# EAGLE board all_boards_revc (EAGLE 6.1)
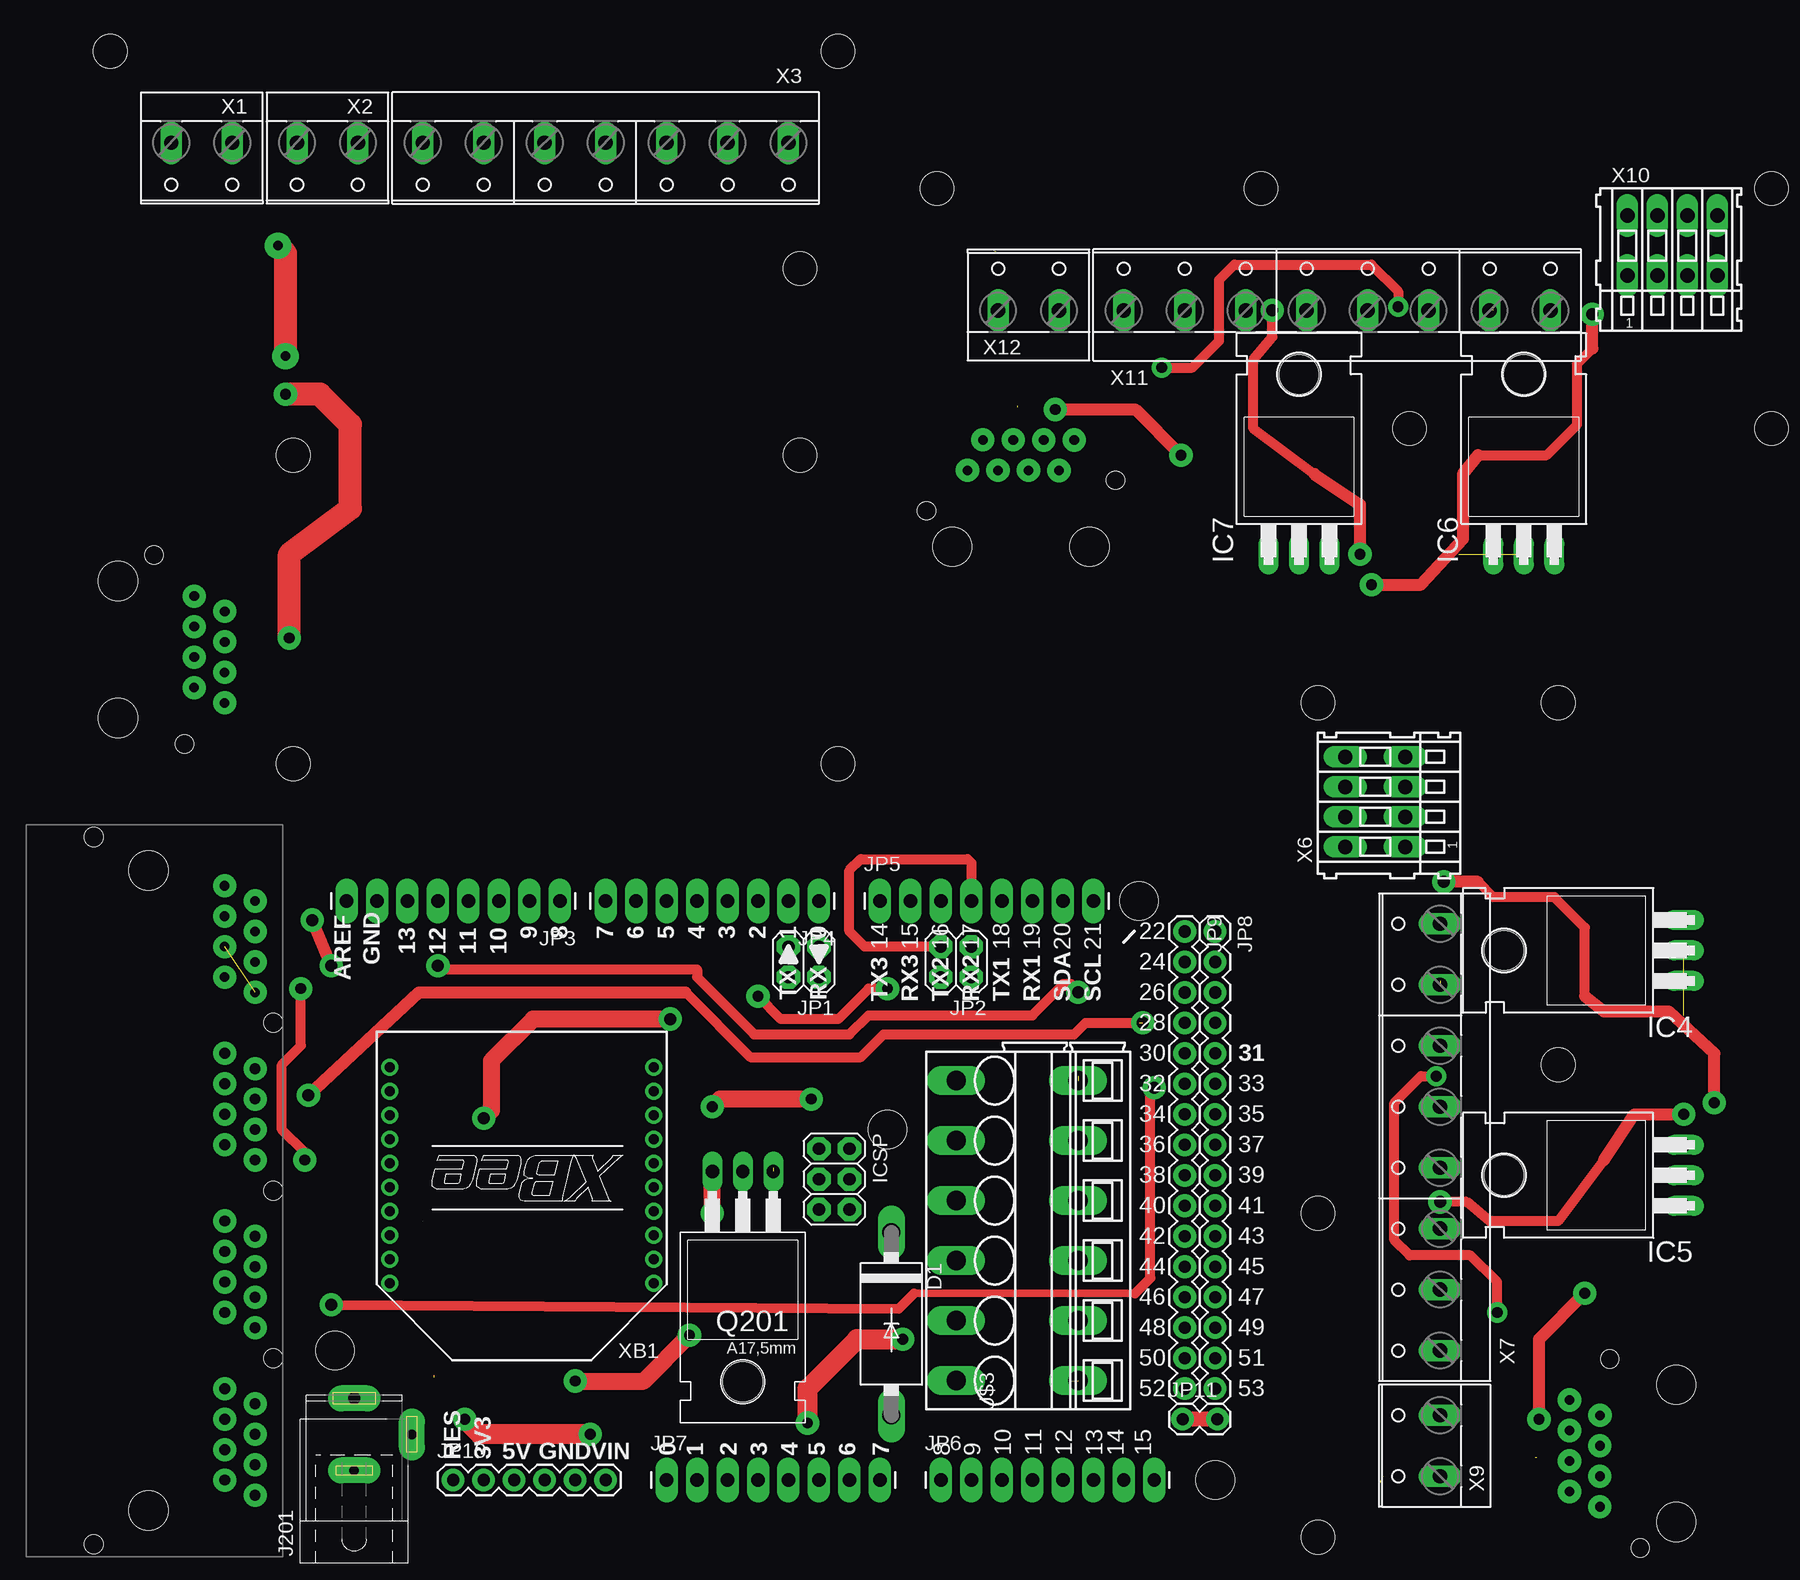
[diagram p0: board, top side]
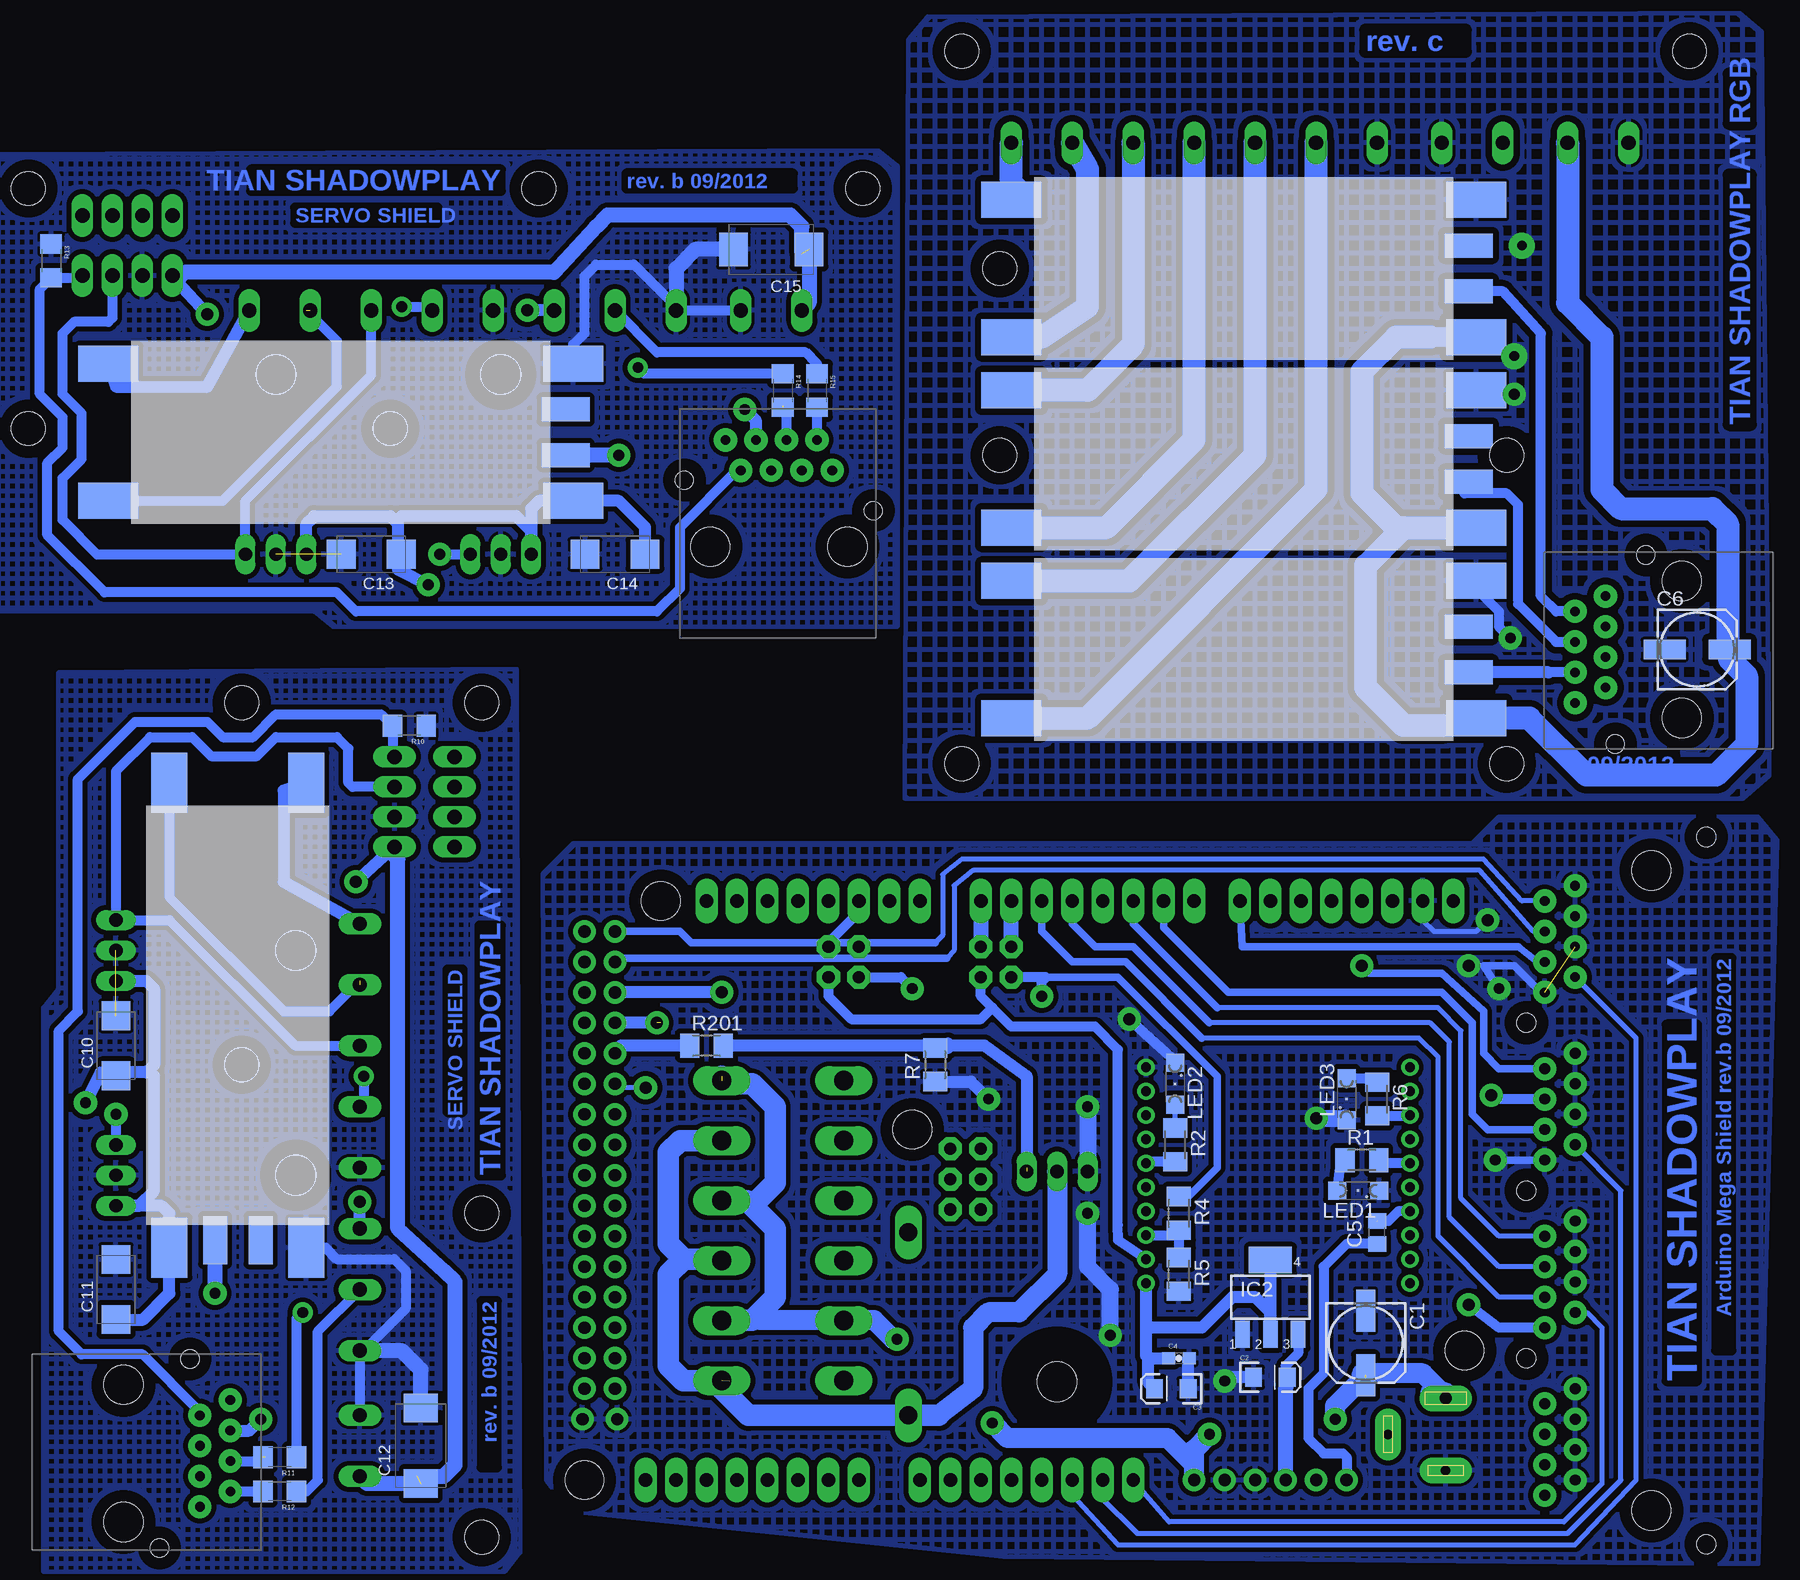
[diagram p1: board, bottom side, seen from below]

No outline drawn. Coordinates in mm, seen from the top.
Copper layers (1*16): Top 0.035mm / dielectric 1.5mm / Bottom 0.035mm
Design rules: minimum track width 10mil, minimum drill 24mil, track to track 8mil, track to pad 8mil, pad to pad 8mil, via to via 8mil, smd to smd 8mil, copper to edge 40mil, drill to drill 8mil, minimum pad ring 10mil, minimum via ring 8mil, stop-mask expansion 4mil, vias tented up to drill 0mil, thermal gap 10mil
Holes 3.2 mm at 92.71,55.24 99.06,6.99 25.72,17.78 71.75,36.2
Holes 2.8 mm at 67.63,126.05 6.99,126.05 67.63,66.67 64.45,92.39 64.45,107.95 22.23,92.39 22.23,66.67 46.99,134.3 34.61,154.31 4.45,154.31 4.45,134.3 73.98,134.3 107.63,29.21 127.64,41.59 127.64,71.75 107.63,71.75 107.63,2.22 102.87,114.62 115.25,94.61 145.41,94.61 145.41,114.62 75.88,114.62

## Footprints (pad centres in the part's own frame; a part is rotated, then mirrored left to right if it is on the bottom)
153CLV-0605 = smd 3.5 x 1.6: + 2.7,0; - -2.7,0
EIA3216 = smd 1.4 x 1.6: A 1.4,0; C -1.4,0
0603-CAP = smd 1.1 x 1: 1 -0.85,0; 2 0.85,0
C0805 = smd 1.3 x 1.5: 1 -0.95,0; 2 0.95,0
SMC_C = smd 2.4 x 2.4: + -2.5,0; - 2.5,0
SMC_E = smd 2.4 x 2.8: + -3.15,0; - 3.15,0
DO27-15 = drill 1.499 long: A 7.62,0; C -7.62,0
SOT223 = smd 1.219 x 2.235: 1 -2.311,-3.099; 2 0,-3.099; 3 2.311,-3.099 | smd 3.6 x 2.2: 4 0,3.099
TO220H = drill 1.118 long: 1 -2.54,-10.16; 2 0,-10.16; 3 2.54,-10.16 | hole 3.302: 0,4.826
2X03 = drill 1.016 pad 1.93 octagon: 1 -2.54,-1.27; 2 -2.54,1.27; 3 0,-1.27; 4 0,1.27; 5 2.54,-1.27; 6 2.54,1.27
SPC4077 = drill 0.8 pad 2.184 long: 1 -3,0; 2 0,-4.8 | drill 1 pad 2.184 long: 3 3,0
2X02 = drill 1.016 pad 1.93 octagon: 1 -1.27,-1.27; 2 -1.27,1.27; 3 1.27,-1.27; 4 1.27,1.27
1X08_LONGPADS = drill 1.118 pad 1.88 long: 1 0,0; 2 2.54,0; 3 5.08,0; 4 7.62,0; 5 10.16,0; 6 12.7,0; 7 15.24,0; 8 17.78,0
1X16 = drill 1.016 pad 1.88: 1 0,0; 2 2.54,0; 3 5.08,0; 4 7.62,0; 5 10.16,0; 6 12.7,0; 7 15.24,0; 8 17.78,0; 9 20.32,0; 10 22.86,0; 11 25.4,0; 12 27.94,0; 13 30.48,0; 14 33.02,0; 15 35.56,0; 16 38.1,0
1X06 = drill 1.016 pad 1.88: 1 0,0; 2 2.54,0; 3 5.08,0; 4 7.62,0; 5 10.16,0; 6 12.7,0
1X02_LOCK = drill 1.016 pad 1.88: 1 -0.178,0; 2 2.718,0
SML1206 = smd 1.5 x 1.5: A 1.75,0; C -1.75,0
4PORT_ETHERNET = drill 0.9 pad 1.93: P$1 25.4,8.89; P$2 24.13,6.35; P$3 22.86,8.89; P$4 21.59,6.35; P$5 20.32,8.89; P$6 19.05,6.35; P$7 17.78,8.89; P$8 16.51,6.35; P$9 11.43,8.89; P$10 10.16,6.35; P$11 8.89,8.89; P$12 7.62,6.35; P$13 6.35,8.89; P$14 5.08,6.35; P$15 3.81,8.89; P$16 2.54,6.35; P$17 -2.54,8.89; P$18 -3.81,6.35; P$19 -5.08,8.89; P$20 -6.35,6.35; P$21 -7.62,8.89; P$22 -8.89,6.35; P$23 -10.16,8.89; P$24 -11.43,6.35 | drill 0.8 pad 1.93: P$25 -16.51,8.89; P$26 -17.78,6.35; P$27 -19.05,8.89; P$28 -20.32,6.35; P$29 -21.59,8.89; P$30 -22.86,6.35; P$31 -24.13,8.89; P$32 -25.4,6.35 | hole 3.25: -26.67,0; 26.67,0 | hole 1.57: -13.97,10.41; 0,10.41; 13.97,10.41; -29.46,-4.57; 29.46,-4.57
TO220 = drill 1.118 long: 1 -2.54,-6.35; 2 0,-6.35; 3 2.54,-6.35 | hole 3.302: 0,11.176
M1206 = smd 1.6 x 2: 1 -1.4,0; 2 1.4,0
1206 = smd 1.6 x 1.8: 1 -1.4,0; 2 1.4,0
BUCK_LED_DRIVER = smd 5 x 3: ANODE -1.905,1.905; KATHODE -1.905,13.335; V+ 36.83,1.905; V- 36.83,13.335 | smd 4 x 2: PWM+ 36.195,5.715; PWM- 36.195,9.525
PHONEIX = drill 1.6 pad 1.8 long: 1 2.58,4.445; 2 7.58,4.445; 3 12.58,4.445; 4 17.58,4.445; 5 22.58,4.445; 6 27.58,4.445; 7 2.58,14.605; 8 7.58,14.605; 9 12.58,14.605; 10 17.58,14.605; 11 22.58,14.605; 12 27.58,14.605
1PORT_ETHERNET = drill 0.8 pad 1.93: P$1 -3.82,3.81; P$2 -6.36,2.54; P$3 -3.82,1.27; P$4 -6.36,0; P$5 -3.82,-1.27; P$6 -6.35,-2.54; P$7 -3.81,-3.81; P$8 -6.35,-5.08 | hole 3.25: 2.54,-6.35; 2.54,5.08 | hole 1.5: -3,-8.51; -0.46,7.24
W237-132 = drill 1.194 long: 1 -2.54,-0.635; 2 2.54,-0.635
W237-7P = drill 1.194 long: 1 -15.24,-0.635; 2 -10.16,-0.635; 3 -5.08,-0.635; 4 0,-0.635; 5 5.08,-0.635; 6 10.16,-0.635; 7 15.24,-0.635
233-104 = drill 1.2 long: A1 -3.75,2.5; A2 -1.25,2.5; A3 1.25,2.5; A4 3.75,2.5; B1 -3.75,-2.5; B2 -1.25,-2.5; B3 1.25,-2.5; B4 3.75,-2.5
W237-8P = drill 1.194 long: 1 -17.78,-0.635; 2 -12.7,-0.635; 3 -7.62,-0.635; 4 -2.54,-0.635; 5 2.54,-0.635; 6 7.62,-0.635; 7 12.7,-0.635; 8 17.78,-0.635
XBEE = drill 0.8 pad 1.422: 1 -11,9; 2 -11,7; 3 -11,5; 4 -11,3; 5 -11,1; 6 -11,-1; 7 -11,-3; 8 -11,-5; 9 -11,-7; 10 -11,-9; 11 11,-9; 12 11,-7; 13 11,-5; 14 11,-3; 15 11,-1; 16 11,1; 17 11,3; 18 11,5; 19 11,7; 20 11,9

## Placement (x,y rotation side)
C1  [153CLV-0605]  33.97,18.41 270 bottom
C2  10uF  [EIA3216]  41.91,15.56 0 bottom
C3  10uF  [EIA3216]  50.16,14.61 180 bottom
C4  0.1uF  [0603-CAP]  49.53,17.14 0 bottom
C5  [C0805]  33.02,27.62 90 bottom
C6  [153CLV-0605]  6.35,76.2 0 bottom
C10  1uF  [SMC_C]  138.11,43.18 90 bottom
C11  1uF  [SMC_C]  138.11,22.86 90 bottom
C12  100uF  [SMC_E]  112.71,9.84 90 bottom
C13  1uF  [SMC_C]  116.84,84.14 180 bottom
C14  1uF  [SMC_C]  96.52,84.14 180 bottom
C15  100uF  [SMC_E]  83.5,109.54 180 bottom
D1  BY550  [DO27-15]  72.07,20 270 top
IC2  MC33269ST-3.3T3  [SOT223]  41.91,22.23 0 bottom
IC4  7806T  [TO220H]  127.95,51.12 90 top
IC5  7806T  [TO220H]  127.95,32.38 90 top
IC6  7806T  [TO220H]  124.78,94.3 0 top
IC7  7806T  [TO220H]  106.05,94.3 0 top
ICSP  [2X03]  67.31,32.07 270 top
J201  [SPC4077]  27.3,10.79 90 top
JP1  [2X02]  64.77,50.16 180 top
JP2  [2X02]  77.47,50.16 180 top
JP3  [1X08_LONGPADS]  44.45,55.24 180 top
JP4  [1X08_LONGPADS]  66.04,55.24 180 top
JP5  [1X08_LONGPADS]  71.12,55.24 0 top
JP6  [1X08_LONGPADS]  76.2,6.99 0 top
JP7  [1X08_LONGPADS]  53.34,6.99 0 top
JP8  M16PTH  [1X16]  99.06,52.7 270 top
JP9  M16PTH  [1X16]  96.52,52.7 270 top
JP10  [1X06]  35.56,6.99 0 top
JP11  [1X02_LOCK]  96.52,12.06 0 top
LED1  [SML1206]  34.61,31.11 180 bottom
LED2  [SML1206]  49.85,40.01 270 bottom
LED3  [SML1206]  35.56,38.73 90 bottom
PORT201  4PORT_ETHERNET  [4PORT_ETHERNET]  10.16,31.11 270 top
Q201  BUZ11  [TO220]  59.69,26.35 180 top
R1  1k  [M1206]  34.29,33.66 0 bottom
R2  1k  [M1206]  49.85,34.92 270 bottom
R4  1k  [M1206]  49.53,29.21 270 bottom
R5  2k  [M1206]  49.53,24.13 270 bottom
R6  1k  [M1206]  33.02,38.73 270 bottom
R7  1k  [M1206]  69.85,41.59 90 bottom
R10  10k  [1206]  113.67,69.85 180 bottom
R11  220R  [1206]  124.46,8.89 180 bottom
R12  220R  [1206]  124.46,6.03 180 bottom
R13  10k  [1206]  143.51,108.58 270 bottom
R14  220R  [1206]  82.55,97.79 270 bottom
R15  220R  [1206]  79.69,97.79 270 bottom
R201  1k  [M1206]  88.9,43.18 0 bottom
U$1  BUCK_LED_DRIVER  [BUCK_LED_DRIVER]  61.59,100.33 0 bottom
U$2  BUCK_LED_DRIVER  [BUCK_LED_DRIVER]  61.59,84.45 0 bottom
U$3  MFKDSP6-5.08  [PHONEIX]  92.08,12.7 90 top
U$4  BUCK_LED_DRIVER  [BUCK_LED_DRIVER]  61.59,68.58 0 bottom
U$5  1PORT_ETHERNET  [1PORT_ETHERNET]  10.16,76.83 0 bottom
U$8  BUCK_LED_DRIVER  [BUCK_LED_DRIVER]  135.57,63.18 270 bottom
U$9  1PORT_ETHERNET  [1PORT_ETHERNET]  134.94,8.57 180 bottom
U$10  BUCK_LED_DRIVER  [BUCK_LED_DRIVER]  136.84,86.68 0 bottom
U$11  1PORT_ETHERNET  [1PORT_ETHERNET]  82.23,87.31 270 bottom
X1  [W237-132]  14.61,117.79 180 top
X2  [W237-132]  25.08,117.79 180 top
X3  [W237-7P]  48.26,117.79 180 top
X6  [233-104]  112.39,63.5 90 top
X7  [W237-8P]  117.16,35.56 90 top
X9  [W237-132]  117.16,9.84 90 top
X10  [233-104]  137.16,109.86 0 top
X11  [W237-8P]  109.22,105.09 0 top
X12  [W237-132]  83.5,105.09 0 top
XB1  XBEE  [XBEE]  41.27,32.38 180 top

## Library data of the parts
C1 C5 C6 R1 R2 R4-R7 R201 = rcl
C2-C4 JP3-JP11 R10-R15 = SparkFun
C10-C15 = resistor
D1 = diode
IC2 IC4-IC7 = linear
ICSP JP1 JP2 = pinhead
J201 = con-jack; OC_FARNELL: unknown; OC_NEWARK: unknown
LED1-LED3 = led
PORT201 U$5 U$9 U$11 = strukt
Q201 = transistor-fet
U$1 U$2 U$4 U$8 U$10 = tian
U$3 = con-phoenix-MFKDSP
X1-X3 X7 X9 X11 X12 = con-wago-508; OC_FARNELL: unknown; OC_NEWARK: unknown
X6 X10 = con-wago; MPN: 233-104; OC_FARNELL: unknown; OC_NEWARK: 28K9046
XB1 = maxstream; MPN: XBP24-Z7UIT-004; OC_FARNELL: 1751799; OC_NEWARK: 34R5507

## Nets
3.3V: C3.A C4.1 IC2.2 IC2.4 XB1.1
5V: C2.A IC2.3 JP10.3
12V: C1.+ J201.3 JP10.6 U$3.2 U$3.4 U$3.6
12V1: C6.+ U$1.V+ U$2.V+ U$4.V+ X1.1
12V3: C10.+ C11.+ C12.+ IC4.1 IC5.1 U$8.V+ X6.B1 X9.1
12V4: C13.+ C14.+ C15.+ IC6.1 IC7.1 U$10.V+ X10.B1 X12.1
+6V3: IC4.3 X6.B3 X7.6
+6V4: IC5.3 X7.3
+6V5: IC6.3 X10.B3 X11.6
+6V6: IC7.3 X11.3
A0: JP7.1 PORT201.P$10
A1: JP7.2 PORT201.P$18
A2: JP7.3 PORT201.P$26
A3: JP7.4
A3.3: JP10.2
A4: JP7.5
A5: JP7.6
A6: JP7.7
A7: JP7.8
A8: JP6.1
A9: JP6.2
A10: JP6.3
A11: JP6.4
A12: JP6.5
A13: JP6.6
A14: JP6.7
A15: JP6.8
AREF: JP3.8
D2: JP4.3 PORT201.P$11
D3: JP4.4 PORT201.P$13
D4: JP4.5
D5: JP4.6 PORT201.P$15
D6: JP4.7 PORT201.P$19
D7: JP4.8
D8: JP3.1 PORT201.P$27
D9: JP3.2
D10: JP3.3
D11: JP3.4
D12: JP3.5
D13: JP3.6
D14: JP5.8
D15: JP5.7
D16: JP5.6
D17: JP5.5
D18: JP2.3 JP5.4
D19: JP2.1 JP5.3
D22: JP9.1 PORT201.P$31
D23: JP8.16
D24: JP9.2 PORT201.P$29
D25: JP8.15
D26: JP9.3 PORT201.P$23
D27: JP8.14
D28: JP9.4 PORT201.P$21
D29: JP8.13
D30: JP9.5 R201.1
D31: JP8.12
D32: JP9.6 PORT201.P$9
D33: JP8.11
D34: JP9.7
D35: JP8.10
D36: JP9.8
D37: JP8.9
D38: JP9.9
D39: JP8.8
D40: JP9.10
D41: JP8.7
D42: JP9.11
D43: JP8.6
D44: JP9.12
D45: JP8.5
D46: JP9.13
D47: JP8.4
D48: JP9.14
D49: JP8.3
D50: JP9.15
D51: JP8.2
D52: JP9.16
D53: JP8.1
DIN: R4.2 R5.1 XB1.3
DOUT: JP1.2 JP2.2 XB1.2
DRAIN: D1.A Q201.2 U$3.1 U$3.3 U$3.5
GND: C1.- C2.C C3.C C4.2 IC2.1 J201.1 JP3.7 JP10.4 JP10.5 JP11.1 JP11.2 LED1.C LED2.C LED3.C PORT201.P$2 PORT201.P$4 PORT201.P$6 PORT201.P$8 PORT201.P$12 PORT201.P$14 PORT201.P$16 PORT201.P$17 PORT201.P$20 PORT201.P$22 PORT201.P$24 PORT201.P$25 PORT201.P$28 PORT201.P$30 PORT201.P$32 Q201.3 R5.2 R7.1 XB1.10
GND1: C6.- U$1.V- U$2.V- U$4.V- X1.2 X2.1 X3.7
GND3: C10.- C11.- C12.- IC4.2 IC5.2 R10.1 U$8.V- X6.B2 X7.1 X7.4 X9.2
GND4: C13.- C14.- C15.- IC6.2 IC7.2 R13.1 U$10.V- X10.B2 X11.1 X11.4 X12.2
LED_ANODE1: U$8.ANODE X7.7
LED_ANODE2: U$10.ANODE X11.7
LED_ANODE_BLUE: U$2.ANODE X3.4
LED_ANODE_GREEN: U$4.ANODE X3.6
LED_ANODE_RED: U$1.ANODE X3.2
LED_KATHODE1: U$8.KATHODE X7.8
LED_KATHODE2: U$10.KATHODE X11.8
LED_KATHODE_BLUE: U$2.KATHODE X3.3
LED_KATHODE_GREEN: U$4.KATHODE X3.5
LED_KATHODE_RED: U$1.KATHODE X3.1
N$1: JP1.4 JP2.4 R4.1
N$2: LED1.A R1.1
N$3: Q201.1 R7.2 R201.2
N$4: R1.2 XB1.15
N$5: R6.2 XB1.13
N$6: LED2.A R2.1
N$7: R2.2 XB1.6
N$8: LED3.A R6.1
N$9: C5.2 XB1.17
N$13: U$8.PWM-
N$14: R11.2 U$9.P$4
N$15: R12.2 U$9.P$2
N$16: U$10.PWM-
N$17: R14.2 U$11.P$4
N$18: R15.2 U$11.P$2
PWM1: U$8.PWM+ U$9.P$6
PWM2: U$10.PWM+ U$11.P$6
PWM_BLUE: U$2.PWM+ U$5.P$4
PWM_GREEN: U$4.PWM+ U$5.P$6
PWM_RED: U$1.PWM+ U$5.P$2
RES: C5.1 JP10.1
RX0: JP1.1 JP4.1
SCL: JP5.1
SDA: JP5.2
SIGNAL_PAN1: R12.1 X7.2
SIGNAL_PAN2: R15.1 X11.2
SIGNAL_TILT1: R11.1 X7.5
SIGNAL_TILT2: R14.1 X11.5
TEMP: U$5.P$7
TEMP2: R10.2 U$9.P$7 X6.B4
TEMP3: R13.2 U$11.P$7 X10.B4
TX1: JP1.3 JP4.2
VCC: D1.C

## Tracks (layer width: path | path; a pad name or v marks a point on that pad's centre or on a via)
3.3V
  Bottom 1.016: C3.A 52.07,15.11 52.07,17.14 | 52.07,17.14 52.27,17.35 52.27,19.68 | 52.27,19.68 XB1.1 | 52.07,17.14 C4.1 | IC2.4 IC2.2 | IC2.2 41.91,19.05 | IC2.2 41.91,20.95 43.18,22.23 45.09,22.23 47.62,19.68 52.27,19.68
5V
  Bottom 0.406: C2.A 40.51,15.43
  Bottom 0.813: IC2.3 39.6,17.55 40.64,16.51 40.64,14.73 C2.A
  Bottom 1.27: JP10.3 40.64,14.47 C2.A
12V  (via drill 0.9 pad 1.93)  (2 unrouted)
  Top 1.676: v46.99,10.79 37.78,10.79 v36.51,12.06 | v65.09,11.75 65.09,14.61 69.22,18.73 v73.03,18.73
  Bottom 0.406: J201.3 27.3,14.29
  Bottom 1.016: 84.66,30.28 U$3.4 85.53,30.28 | 87.59,20.32 U$3.2 87.63,20.32
  Bottom 1.676: 27.3,14.29 28.57,14.29 | v46.99,10.79 48.26,9.53 JP10.6 48.26,8.26 50.48,10.48 63.82,10.48 v65.09,11.75 | v36.51,12.06 36.51,13.18 C1.+ | v73.03,18.73 73.34,18.73 74.93,20.32 84.45,20.32 84.77,20.64 | J201.3 27.3,13.97 29.21,15.88 33.97,15.88 | 33.97,15.88 34.29,15.56 34.29,15.88 33.97,15.56 33.97,15.88
  Bottom 1.778: 84.66,30.28 83.19,31.75 83.19,38.1 85.09,40.01 87,40.01 87.63,40.64 | 85.53,30.28 83.19,27.94 83.19,22.23 84.77,20.64 85.09,20.32 87.59,20.32
12V1
  Bottom 1.422: 3.65,75.41 C6.+ 3.81,76.36
  Bottom 1.676: U$4.V+ 27.62,69.85 | 28.26,86.36 26.35,86.36 U$2.V+ | U$1.V+ 28.57,102.23
  Bottom 1.93: 3.65,75.41 2.22,73.98 2.22,68.26 4.76,65.72 15.56,65.72 20.32,70.48 U$4.V+ | X1.1 17.14,105.09 14.29,102.23 14.29,89.53 12.7,87.95 5.08,87.95 3.81,86.68 3.81,76.36 | 27.62,69.85 30.8,69.85 33.97,73.03 33.97,83.19 31.11,86.04 | 31.11,86.04 30.8,86.36 26.35,86.36 26.35,86.68 | 28.57,102.23 31.43,102.23 34.29,99.38 34.29,89.22 31.11,86.04
12V3  (via drill 0.9 pad 1.93, 1 pad 1.93)  (1 unrouted)
  Top 0.813: 129.86,47.31 129.86,53.02 127.32,55.56 122.24,55.56 120.97,56.83
  Top 1.016: v140.65,38.42 140.65,42.55 136.84,46.04 131.44,46.04 129.86,47.31 | 120.97,56.83 v118.11,56.83
  Bottom 1.016: IC4.1 135.57,48.58 134.94,47.94 134.94,41.59 135.41,41.12 | 135.41,41.12 135.57,40.96 138.07,40.96 C10.+ 139.38,40.96 v140.65,38.42 | v118.11,56.83 115.3,59.45 114.94,59.79 X6.B1 | 135.41,41.12 134.94,40.64 134.94,31.11 136.21,29.84 IC5.1 134.3,29.84 133.67,29.21 U$8.V+ 133.67,22.54 135.85,20.36 C11.+
  Bottom 1.27: 115.3,59.45 114.62,58.76 114.62,27.94 110.81,24.45 109.86,23.5 109.86,8.26 110.81,7.3 113.03,7.3 | C12.+ 117.18,6.69 X9.1
12V4  (via drill 0.9 pad 1.93, 1 pad 1.93)  (1 unrouted)
  Top 0.813: 120.97,92.39 126.68,92.39 129.22,94.93 129.22,100.01 130.49,101.28
  Top 1.016: v112.08,81.6 116.2,81.6 119.7,85.41 119.7,90.81 120.97,92.39 | 130.49,101.28 v130.49,104.14
  Bottom 1.016: IC6.1 122.24,86.68 121.6,87.31 115.25,87.31 114.78,86.84 | 114.78,86.84 114.62,86.68 114.62,84.18 C13.+ 114.62,82.87 v112.08,81.6 | v130.49,104.14 133.11,106.95 133.45,107.31 X10.B1 | 114.78,86.84 114.3,87.31 104.78,87.31 103.5,86.04 IC7.1 103.5,87.95 102.87,88.58 U$10.V+ 96.2,88.58 94.02,86.4 C14.+
  Bottom 1.27: 133.11,106.95 132.42,107.63 101.6,107.63 98.11,111.44 97.16,112.39 81.92,112.39 80.96,111.44 80.96,109.22 | C15.+ 80.35,105.07 X12.1
+6V3
  Bottom 0.813: X7.6 123.19,43.18 133.67,53.66 IC4.3 138.11,66.04 135.25,68.9 131.76,68.9 130.18,67.31 126.36,67.31 124.78,68.9 119.7,68.9 118.75,67.94 118.75,65.09 118.41,64.75 X6.B3
+6V4  (via drill 0.9 pad 1.93, 1 pad 1.93)
  Top 0.813: 131.44,33.66 127.64,28.57 121.92,28.57 120.02,30.16 v117.79,30.16
  Top 1.016: 131.44,33.66 133.99,37.47 v138.11,37.47
  Bottom 0.813: v138.11,37.47 IC5.3
  Bottom 1.016: X7.3 v117.79,30.16
+6V5
  Bottom 0.813: X11.6 116.84,99.06 127.32,88.58 IC6.3 139.7,84.14 142.56,87 142.56,90.49 140.97,92.08 140.97,95.89 142.56,97.47 142.56,102.55 141.6,103.5 138.75,103.5 138.41,103.84 X10.B3
+6V6  (via drill 0.9 pad 1.93, 1 pad 1.93)
  Top 0.813: 107.31,90.81 102.23,94.61 102.23,100.33 103.82,102.23 v103.82,104.46
  Top 1.016: 107.31,90.81 111.12,88.27 v111.12,84.14
  Bottom 0.813: v111.12,84.14 IC7.3
  Bottom 1.016: X11.3 v103.82,104.46
A0
  Bottom 0.406: PORT201.P$10 15.56,20.95 14.29,19.68 14.29,6.67 17.46,3.49 50.35,3.49 JP7.1
A1
  Bottom 0.406: JP7.2 56.07,5.59 53.02,2.54 17.14,2.54 12.7,6.99 12.7,31.11 PORT201.P$18
A2
  Bottom 0.406: JP7.3 58.42,5.71 54.61,1.59 16.51,1.59 11.43,6.99 11.43,43.81 PORT201.P$26
D2
  Bottom 0.406: PORT201.P$11 22.86,22.23 27.94,27.3 27.94,42.23 29.53,43.81 47.62,43.81
  Bottom 0.61: 47.62,43.81 53.98,50.16 58.42,50.16 60.96,52.7 JP4.3
D3
  Bottom 0.406: PORT201.P$13 22.86,24.77 26.99,28.89 26.99,43.5 28.57,45.09 46.99,45.09
  Bottom 0.61: 46.99,45.09 53.34,51.44 56.52,51.44 58.42,53.34 JP4.4
D5
  Bottom 0.406: PORT201.P$15 22.86,27.3 26.04,30.48 26.04,44.45 27.94,46.35 46.35,46.35
  Bottom 0.61: 46.35,46.35 53.34,53.34 JP4.6
D6
  Bottom 0.61: PORT201.P$19 23.81,36.2 25.08,37.47 25.08,45.09 27.62,47.62 45.4,47.62 50.8,53.02 JP4.7
D8
  Bottom 0.406: PORT201.P$27 19.68,50.16
  Bottom 0.61: 19.68,50.16 21.27,51.44 44.26,51.44 JP3.1
D18
  Top 0.813: JP2.3 69.85,51.44 68.58,52.7 68.58,57.78 69.53,58.74 78.42,58.74 78.74,58.42 JP5.4
D19
  Bottom 0.813: JP2.1 78.74,51.75 76.2,54.29 JP5.3
D22
  Bottom 0.406: PORT201.P$31 20.95,55.24 24.13,58.74 67.63,58.74 69.22,57.47 69.22,52.39 69.85,51.75
  Bottom 0.61: 69.85,51.75 90.17,51.75 91.12,52.7 JP9.1
D24
  Bottom 0.406: PORT201.P$29 20,52.7 24.45,57.78 66.67,57.78 68.26,56.52 68.26,51.12 68.9,50.48 | 96.08,50.48 JP9.2
  Bottom 0.61: 68.9,50.48 96.08,50.48
D26  (via drill 1 pad 1.93)
  Top 0.406: 87,48.26 v87.63,47.62 | 34.61,49.53 v34.29,49.85
  Top 0.813: 34.61,49.53 55.88,49.53 55.88,48.9 60.64,44.13 68.58,44.13 70.17,45.72 83.82,45.72 86.36,48.26
  Top 1.016: 86.36,48.26 87,48.26
  Bottom 0.61: PORT201.P$23 22.86,41.27 24.13,42.55 24.13,46.04 27.62,49.21 33.66,49.21 v34.29,49.85
  Bottom 1.016: v87.63,47.62 JP9.3
D28  (via drill 1 pad 1.93)  (1 unrouted)
  Top 0.813: 54.93,47.62 60.33,42.23 69.53,42.23 71.44,44.13 87.31,44.13 88.27,45.09 92.71,45.09 93.03,45.4
  Top 1.016: v23.5,39.05 32.7,47.62 54.93,47.62
  Bottom 0.813: PORT201.P$21 23.18,38.73 v23.5,39.05
  Bottom 1.016: v93.03,45.09 JP9.4
D30
  Bottom 0.406: 96.01,43.18 JP9.5
  Bottom 1.016: R201.1 96.01,43.18
D32  (via drill 1 pad 1.93)
  Top 0.406: 93.66,39.37 v93.98,39.69
  Top 0.61: 73.98,22.54 92.39,22.54
  Top 0.813: v25.4,21.59 72.71,21.27 73.98,22.54 | 92.39,22.54 93.66,23.81 93.66,39.37
  Bottom 0.406: v93.98,39.69 96.08,39.69 JP9.6
  Bottom 0.813: PORT201.P$9 22.86,19.68 v25.4,21.59
DIN
  Bottom 0.406: 49.95,27.39 R4.2
  Bottom 0.813: R4.2 R5.1 | XB1.3 49.95,27.39
DOUT
  Bottom 0.813: XB1.2 54.59,26.97 54.61,28.26 54.61,42.86 56.52,44.77 63.5,44.77 65.09,46.35 | 65.09,46.35 66.04,47.31 JP1.2 | JP2.2 78.74,47.31 76.83,45.4 66.04,45.4 65.09,46.35
DRAIN  (1 unrouted)
  Bottom 1.422: 87,15.24 88.27,15.24
  Bottom 1.676: 87.75,25.4 U$3.3 | Q201.2 59.69,24.13 62.87,20.95 65.41,20.95 66.67,19.68 66.67,14.61 69.53,12.38
  Bottom 1.778: U$3.1 90.84,15.28 92.08,16.51 92.08,24.13 90.81,25.4 | 90.81,25.4 87.75,25.4 | U$3.5 91.08,35.28 92.08,34.29 92.08,26.67 90.81,25.4 | 88.27,15.24 85.41,12.38 D1.A 69.53,12.38
GND  (via drill 0.9 pad 1.93, 1 pad 1.93)  (1 unrouted)
  Top 0.406: v23.18,33.66 23.18,34.29
  Top 0.813: 23.18,34.29 21.27,36.2 21.27,41.59 22.86,43.18 v22.86,47.94
  Top 1.016: v25.4,49.85 v23.81,53.66
  Top 1.27: JP11.2 JP11.1
  Top 1.422: v53.66,45.4 42.23,45.4 38.73,41.91 38.73,37.78 v38.1,37.15 | v45.72,15.24 51.44,15.24 v55.24,19.05 | v57.15,29.21 Q201.3 | v65.41,38.73 57.78,38.73 v57.15,38.1
  Bottom 0.406: LED2.C 50.16,42.23 | 35.72,37.15 LED3.C | PORT201.P$25 19.37,47.62 | 24.13,49.85 v25.4,49.85 | JP3.7 29.21,53.66 28.26,52.7 24.77,52.7 v23.81,53.66
  Bottom 0.61: 19.37,47.62 21.59,49.85 24.13,49.85 v22.86,47.94 | PORT201.P$17 v23.18,33.66
  Bottom 0.813: 50.16,42.23 v53.66,45.4
  Bottom 1.016: C3.C 48.77,17.06 C4.2 | C2.C 45.4,15.56 v45.72,15.24 | R7.1 66.86,40.19 v65.41,38.73
  Bottom 1.422: v38.1,37.15 35.72,37.15 | v55.24,19.05 55.24,22.86 57.15,24.77 v57.15,29.21 | v57.15,38.1 Q201.3
  pour Bottom (isolate 0.406, hatched): 1.27,62.23 22.86,62.23 25.08,60.01 100.01,60.01 102.55,57.47 102.23,6.99 100.33,4.45 64.14,0.64 1.27,0 -0.32,60.33
GND1  (via drill 0.8 pad 2.18, 0.9 pad 1.93)
  Top 1.93: v21.59,100.65 21.59,109.22 v20.95,109.86 | v21.91,77.15 21.91,84.14 26.99,87.95 26.99,94.93 24.45,97.47 v21.59,97.47
  Bottom 0.813: U$4.V- 25.4,81.92 22.86,79.38 22.86,78.11 v21.91,77.15 | v21.59,97.47 25.72,97.47 U$2.V-
  pour Bottom (isolate 0.55, hatched): 0.32,65.72 0.95,127.64 2.86,129.22 70.48,128.91 72.07,127 72.39,63.82 2.54,63.82
GND3  (1 unrouted)
  Bottom 0.813: X7.1 X9.2 | U$8.V- 120.65,26.35 119.7,25.4 114.94,25.4 113.98,24.45 113.98,21.27 117.47,17.78
  Bottom 1.27: C12.- 112.71,16.19 114.3,17.78 117.47,17.78 X7.1
  pour Bottom (isolate 0.406, hatched): 144.15,-0.64 144.15,46.35 142.88,47.94 142.88,74.3 104.78,74.61 104.46,0.95 105.73,-0.64
GND4  (1 unrouted)
  Bottom 0.813: X11.1 X12.2 | U$10.V- 100.01,101.6 99.06,102.55 99.06,107.31 98.11,108.27 94.93,108.27 91.44,104.78
  Bottom 1.27: C15.- 89.85,109.54 91.44,107.95 91.44,104.78 X11.1
  pour Bottom (isolate 0.406, hatched): 73.03,78.11 120.02,78.11 121.6,79.38 147.96,79.38 148.27,117.47 74.61,117.79 73.03,116.52
LED_ANODE  (1 unrouted)
LED_ANODE1  (1 unrouted)
  Bottom 0.813: U$8.ANODE 133.67,55.56 124.14,46.04 120.33,46.04 117.79,48.58
  Bottom 1.016: X7.7 119.06,48.26
LED_ANODE2  (1 unrouted)
  Bottom 0.813: U$10.ANODE 129.22,88.58 119.7,98.11 119.7,101.92 122.24,104.46
  Bottom 1.016: X11.7 121.92,103.19
LED_ANODE_BLUE
  Bottom 1.93: U$2.ANODE 55.56,86.36 48.26,93.66 X3.4
LED_ANODE_GREEN
  Bottom 1.93: U$4.ANODE 57.15,70.48 38.1,89.53 X3.6
LED_ANODE_RED
  Bottom 1.93: U$1.ANODE 60.96,102.23 57.15,104.78 57.15,116.2 X3.2
LED_KATHODE1
  Bottom 1.016: U$8.KATHODE 124.14,64.45 124.14,56.83 X7.8
LED_KATHODE2
  Bottom 1.016: U$10.KATHODE 138.11,98.11 130.49,98.11 X11.8
LED_KATHODE_BLUE
  Bottom 1.93: X3.3 53.34,101.6 57.15,97.79 U$2.KATHODE
LED_KATHODE_GREEN
  Bottom 1.93: U$4.KATHODE 53.66,81.92 43.18,92.39 X3.5
LED_KATHODE_RED
  Bottom 1.676: U$1.KATHODE 62.23,113.98 63.5,115.25
  Bottom 1.93: 63.5,115.25 X3.1
N$1  (via drill 0.9 pad 1.93)
  Top 0.813: v71.75,47.94 70.17,47.94 67.63,45.4 62.87,45.4 v60.96,47.31
  Bottom 0.406: R4.1 48.77,30.61
  Bottom 0.61: 48.77,30.61 46.35,33.02 46.35,40.64 54.61,48.9 60.64,48.9 | 60.96,48.9 JP1.4
  Bottom 0.813: JP2.4 72.71,48.9 v71.75,47.94 | v60.96,47.31 60.96,48.58 60.64,48.9 60.96,48.9 63.82,48.9
N$2
  Bottom 0.406: 36.04,33.3 R1.1
  Bottom 0.813: LED1.A 36.04,33.3
N$3  (1 unrouted)
  Bottom 1.016: 68.58,43.18 65.72,43.18 62.23,40.64 62.23,33.02 | 68.58,43.18 R201.2 | 68.77,43.37 68.58,43.18 | R7.2 68.77,42.99 68.58,43.18
N$4
  Bottom 0.406: 32.62,33.38 R1.2
  Bottom 0.813: XB1.15 32.62,33.38
N$5
  Bottom 0.406: 30.32,37.34 XB1.13
  Bottom 0.813: R6.2 30.32,37.34
N$6
  Bottom 0.406: R2.1 LED2.A
N$7
  Bottom 0.406: 52.13,33.52 XB1.6
  Bottom 0.813: R2.2 52.13,33.52
N$8
  Bottom 0.406: 33.37,40.48 R6.1
  Bottom 0.813: LED3.A 33.37,40.48
N$9  (1 unrouted)
  Bottom 0.813: XB1.17 31.26,29.39 32.07,28.57 C5.2
N$14  (1 unrouted)
  Bottom 0.406: U$9.P$4 128.58,8.26
  Bottom 0.813: U$9.P$4 126.05,8.57 125.73,8.89
N$15
  Bottom 0.813: R12.2 U$9.P$2
N$17  (1 unrouted)
  Bottom 0.406: U$11.P$4 81.92,93.67
  Bottom 0.813: U$11.P$4 82.23,96.2 82.55,96.52
N$18
  Bottom 0.813: R15.2 U$11.P$2
PWM1  (via drill 0.9 pad 1.93)
  Top 1.016: v126.05,12.06 126.05,18.73 v129.86,22.54
  Bottom 1.016: U$9.P$6 127,11.11 v126.05,12.06
  Bottom 1.27: v129.86,22.54 U$8.PWM+
PWM2  (via drill 0.9 pad 1.93)
  Top 1.016: v85.72,96.2 92.39,96.2 v96.2,92.39
  Bottom 1.016: U$11.P$6 84.77,95.25 v85.72,96.2
  Bottom 1.27: v96.2,92.39 U$10.PWM+
PWM_BLUE
  Bottom 0.406: 21.27,80.33 21.27,80.01
  Bottom 0.813: 21.27,80.33 21.27,88.27 22.23,89.22 25.72,89.22 U$2.PWM+ | 21.27,80.01 18.1,76.83 U$5.P$4
PWM_GREEN
  Bottom 0.813: U$5.P$6 18.73,74.3
  Bottom 1.016: 18.73,74.3 U$4.PWM+
PWM_RED
  Bottom 0.813: U$1.PWM+ 22.54,106.05 19.37,102.55 19.37,80.64 18.1,79.38 U$5.P$2
RES
  Bottom 0.813: C5.1 35.56,26.67 37.47,24.77 37.47,15.88 38.73,14.61 38.73,10.48 37.47,9.21 35.88,9.21 35.56,8.89 JP10.1
RX0
  Bottom 1.27: JP4.1 JP1.1
S$12  (1 unrouted)
SIGNAL_PAN1
  Bottom 0.813: R12.1 122.24,6.03 121.28,6.99 121.28,19.37 X7.2
SIGNAL_PAN2
  Bottom 0.813: R15.1 79.69,100.01 80.64,100.97 93.03,100.97 X11.2
SIGNAL_TILT1  (via drill 0.9 pad 1.68)
  Top 0.813: v122.56,20.95 122.56,23.5 120.33,25.72 115.25,25.72 113.98,26.99 113.98,38.42 116.2,40.64 v117.47,40.64
  Bottom 0.813: R11.1 123.06,20.45 v122.56,20.95 | v117.47,40.64 117.47,38.42 X7.5
SIGNAL_TILT2  (via drill 0.9 pad 1.68)
  Top 0.813: v94.61,99.69 97.16,99.69 99.38,101.92 99.38,107 100.65,108.27 112.08,108.27 114.3,106.05 v114.3,104.78
  Bottom 0.813: R14.1 94.11,99.19 v94.61,99.69 | v114.3,104.78 112.08,104.78 X11.5
TEMP2
  Bottom 0.813: X6.B4 115.06,67.42 R10.2 116.02,70.8 124.78,70.8 126.68,68.9 129.22,68.9 130.49,70.17 136.53,70.17 141.29,65.41 141.29,46.04 142.88,44.45 142.88,19.37 140.97,17.46 135.89,17.46 131.13,12.7 U$9.P$7
TEMP3
  Bottom 0.813: X10.B4 141.08,107.19 R13.2 144.46,106.23 144.46,97.47 142.56,95.57 142.56,93.03 143.83,91.76 143.83,85.72 139.06,80.96 119.7,80.96 118.11,79.38 93.03,79.38 91.12,81.28 91.12,86.36 86.36,91.12 U$11.P$7
TX1
  Bottom 1.27: JP1.3 JP4.2

## Text on the board
Bottom: rev. c | RGB | TIAN SHADOWPLAY | rev. b 09/2012 | SERVO SHIELD | TIAN SHADOWPLAY | 09/2012 | Arduino Mega Shield rev.b 09/2012 | SERVO SHIELD | TIAN SHADOWPLAY | rev. b 09/2012 | TIAN SHADOWPLAY
tPlace: 9 | 8 | 7 | 6 | 5 | 4 | 3 | 2 | 1 | 0 | 22 | 13 | 12 | 11 | 10 | 14 | 15 | 16 | 17 | 18 | 19 | 20 | 21 | GND | 24 | AREF | TX | RX | TX3 | RX3 | TX2 | RX2 | TX1 | RX1 | SDA | SCL | 26 | 28 | 30 | 31 | 32 | 33 | 34 | 35 | 36 | 37 | 38 | 39 | 40 | 41 | 42 | 43 | 44 | 45 | 46 | 47 | 48 | 49 | 50 | 51 | 52 | 53 | RES | 3V3 | 5V | GND | VIN | 0 | 1 | 2 | 3 | 4 | 5 | 6 | 7 | 8 | 9 | 10 | 11 | 12 | 13 | 14 | 15